# Altium PCB StressMonitor.PcbDoc
Units mm, origin at the board's own origin, x right, y up, seen from the top; angles counter-clockwise.
Board outline 120.4 x 93.47 mm, 2 copper layers (Top Layer, Bottom Layer); 66 components, 80 nets, 518 pads, 43 vias.
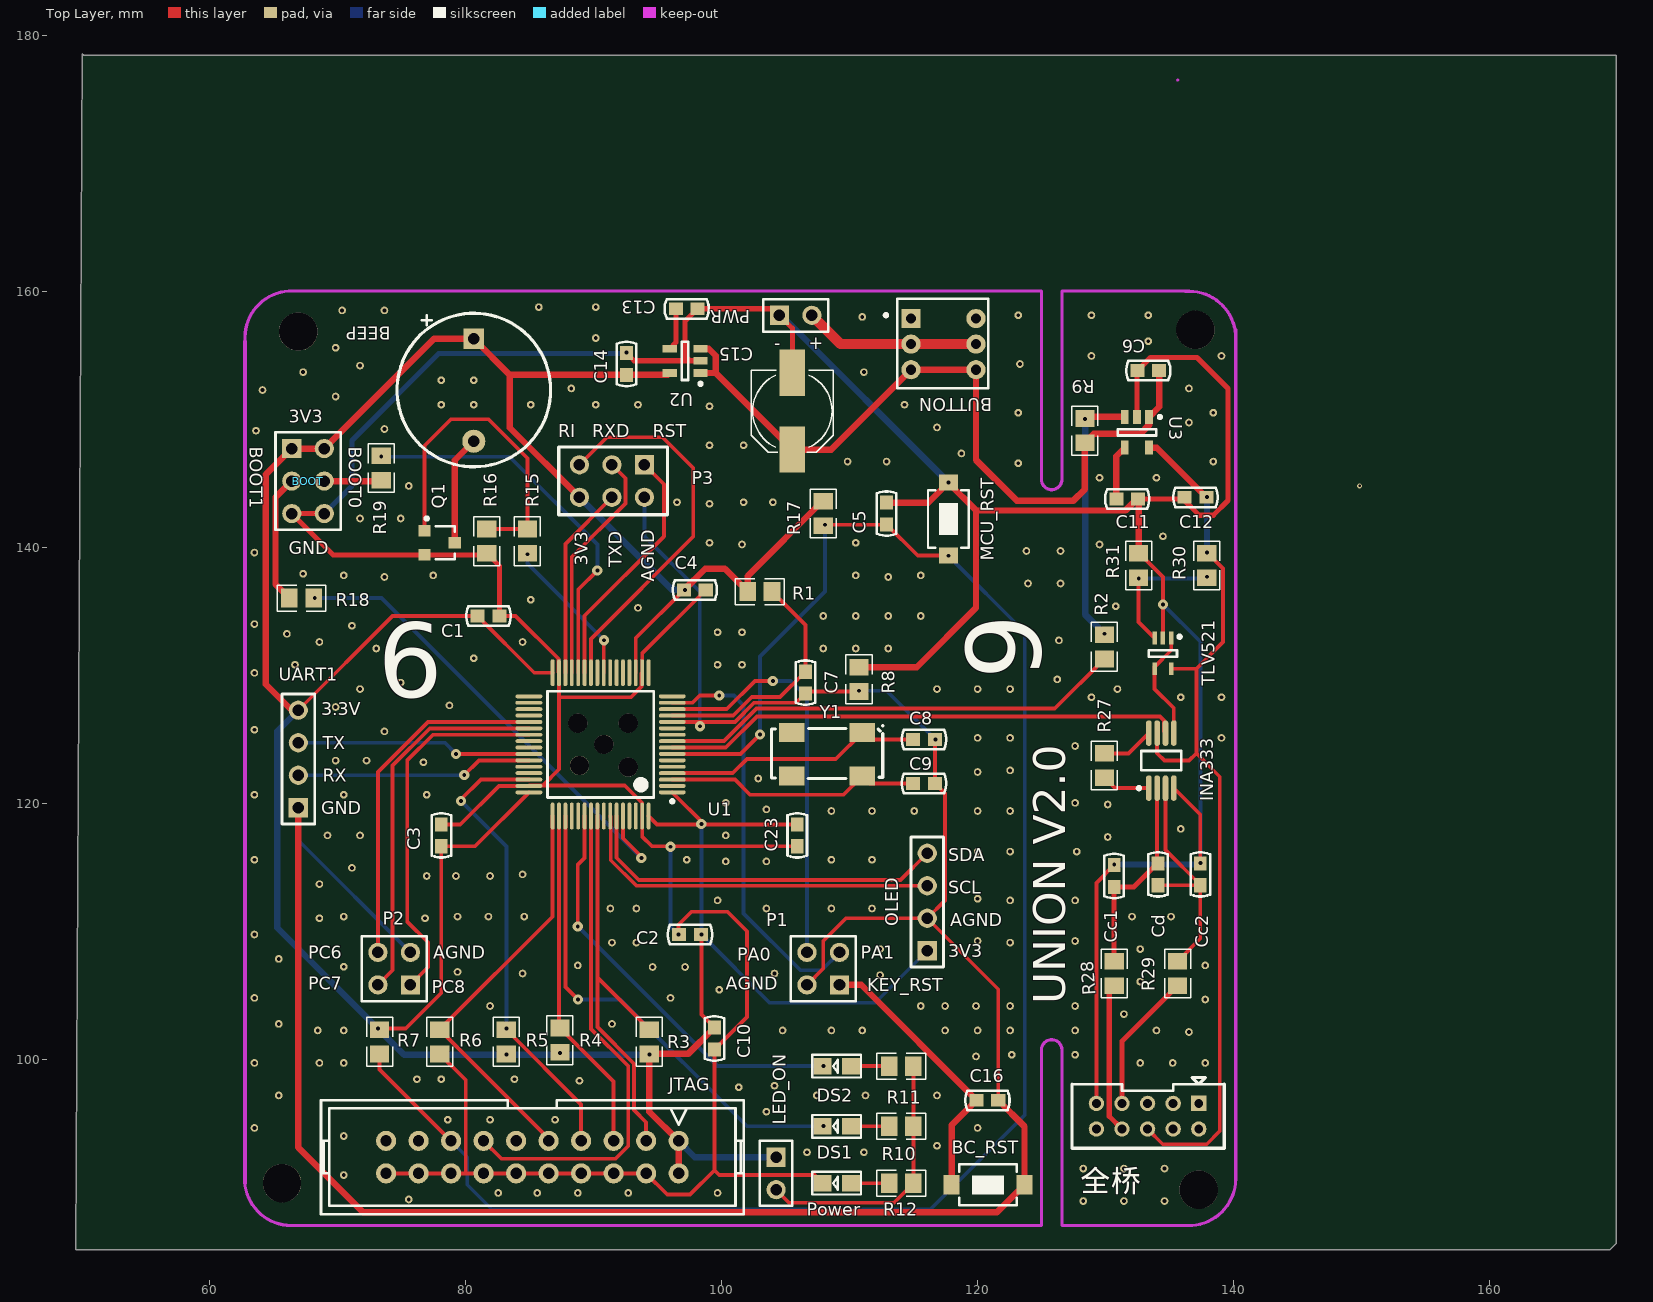
[diagram p0: Top Layer view]
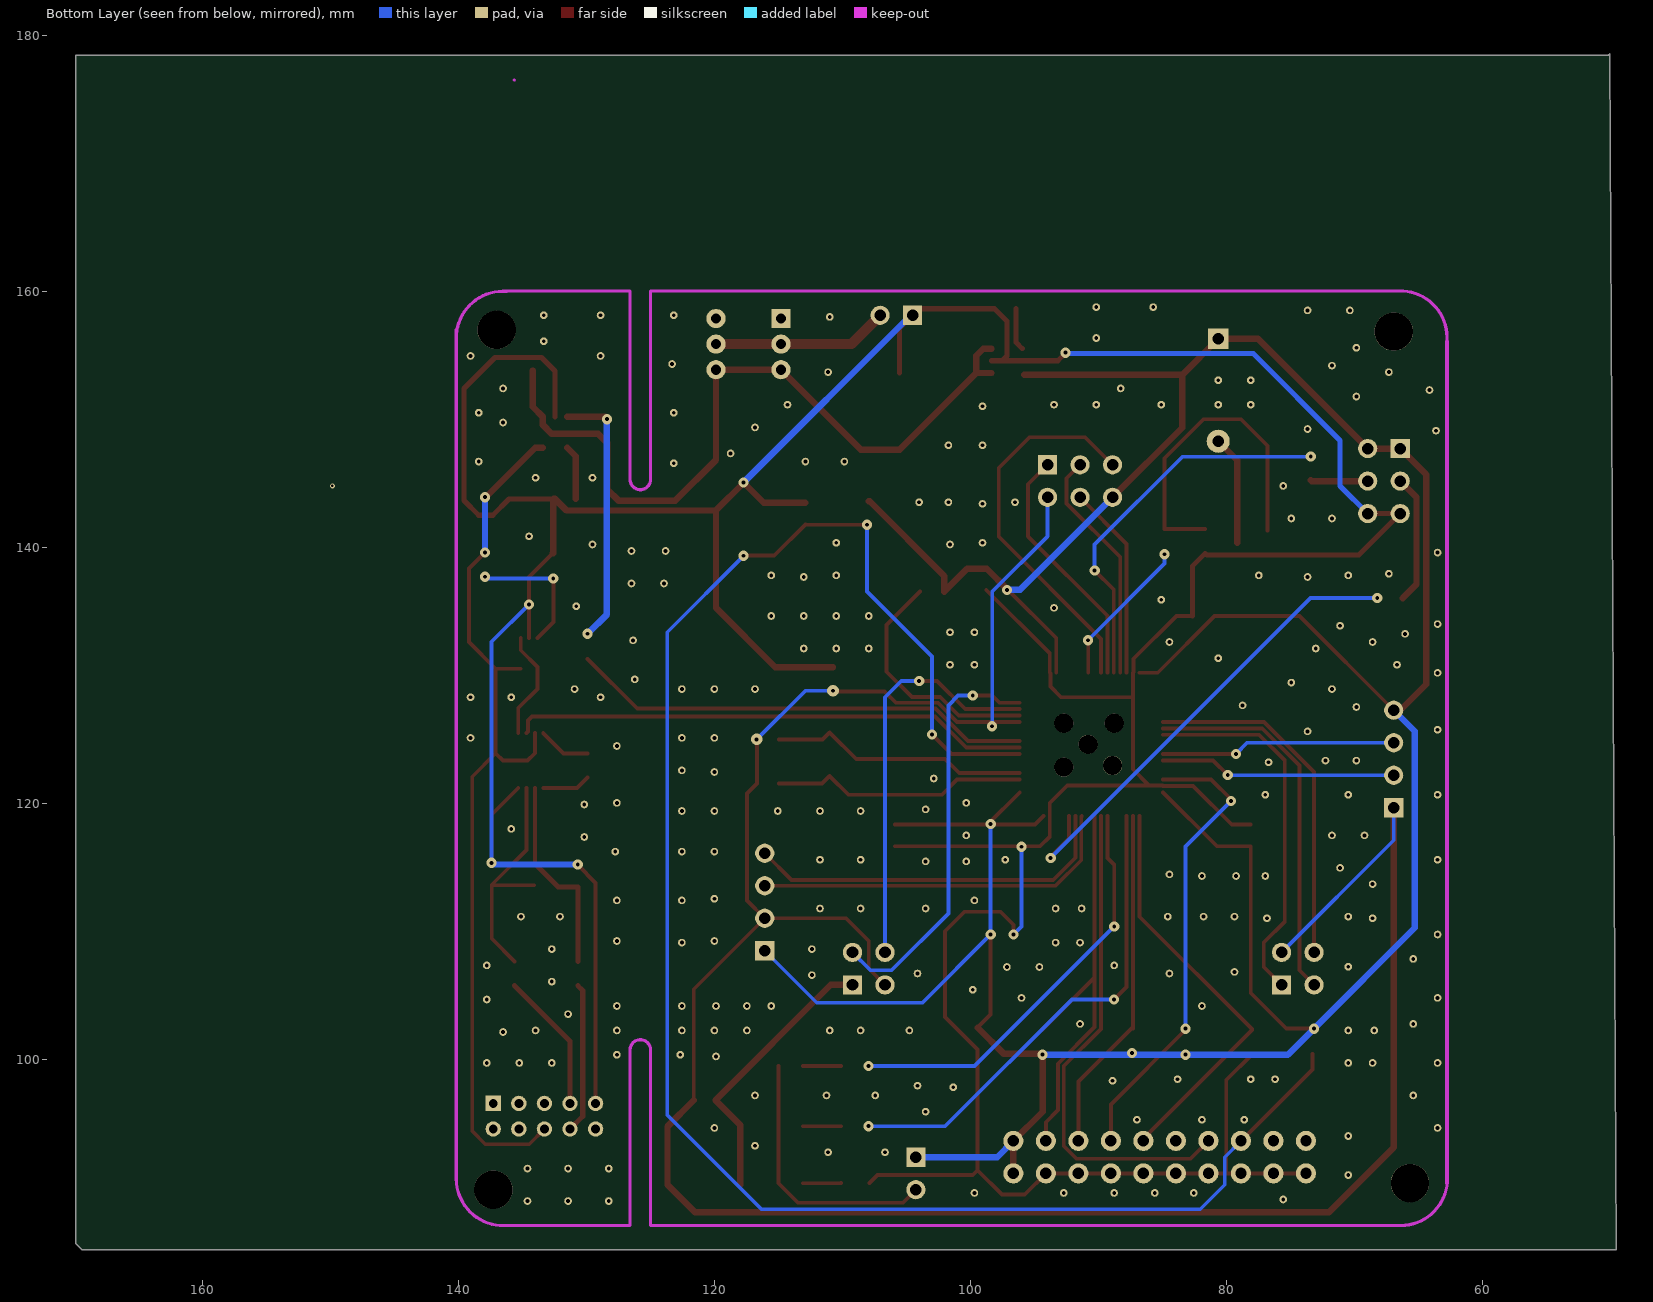
[diagram p1: Bottom Layer view, seen from below]

## Layer stack, top to bottom
Top Layer: signal copper 0.0356
Dielectric: dielectric 0.32, FR-4, Dk 4.8
Bottom Layer: signal copper 0.0356

## Board outline
50.038,178.562 50.165,178.435 169.926,178.435 169.926,85.598 169.418,85.09 49.53,85.09

## Design rules (kind name [scope] priority, off if disabled: settings)
Clearance [All] p1: gap=0.152
HoleSize [All] p1: absolutevalues=TRUE maxlimit=4 minlimit=0.025 maxpercent=80.000 minpercent=20.000
MinimumSolderMaskSliver [All] p1: minsoldermaskwidth=0
PolygonConnect [All] p1: connectstyle=Relief reliefconductorwidth=0.254 reliefentries=4 polygonreliefangle="90 Angle" airgapwidth=0.254
RoutingVias [All] p1: holewidth=0.3 width=1.6 viastyle="Through Hole" minholewidth=0.1 minwidth=0.4 maxholewidth=0.8 maxwidth=1.27
SilkToSilkClearance [All] p1: silktosilkclearance=0
SilkToSolderMaskClearance [IsPad] p1: minsilkscreentomaskgap=0 clearancetoexposedcopper=TRUE
SolderMaskExpansion [All] p1: expansion=0.102
Width GND [(InNet('AGND') AND InNet('GND'))] p1: maxlimit=0.8 minlimit=0.3 preferedwidth=0.6
Width PWR [(InNet('PWR_IN1') OR InNet('PWR_IN2') OR InNet('PWR_MCU') OR InNet('VDDA') OR InNet('PWR_SGN'))] p2: maxlimit=0.8 minlimit=0.3 preferedwidth=0.5
Width [All] p3: maxlimit=0.8 minlimit=0.256 preferedwidth=0.3
24 further rules are at their usual default settings.

## Components (designator, comment, footprint, x,y, rotation, side; value= is the part's Value field where it differs from the comment)
BC_RST "SW-PB" SW_PB2_A2 120.777,90.17 r270 top
BEEP "BEEP" Beep 80.645,152.273 r270 top
BOOT "HEADER3×2" HDR2X3 66.421,147.701 r270 top
BUTTON "SW-DPDT1" SWITCH_B2 117.348,155.321 r0 top (schematic designator BUTTON1)
C1 "104" C-RAD-0603 81.788,134.62 r180 top
C2 "104" C-RAD-0603 97.536,109.728 r0 top
C3 "104" C-RAD-0603 78.105,117.475 r270 top
C4 "104" C-RAD-0603 97.917,136.652 r0 top
C5 "104" C-RAD-0603 112.903,142.621 r90 top
C6 "1uF" C-RAD-0603 133.35,153.797 r180 top
C7 "104" C-RAD-0603 106.553,129.413 r270 top
C8 "4.3pF" C-RAD-0603 115.824,124.968 r180 top
C9 "4.3pF" C-RAD-0603 115.824,121.539 r180 top
C10 "104" C-RAD-0603 99.441,101.6 r270 top
C11 "0.01uF" C-RAD-0603 131.699,143.764 r0 top
C12 "1uF" C-RAD-0603 137.033,143.891 r0 top
C13 "0.01uF" C-RAD-0603 97.282,158.623 r0 top
C14 "1uF" C-RAD-0603 92.583,154.305 r270 top
C15 "100uF" C-RB-S6 105.537,150.622 r90 top
C16 "104" C-RAD-0603 120.777,96.774 r180 top
C23 "1uF" C-RAD-0603 105.918,117.475 r90 top
Cc1 "Cap" C-RAD-0603 130.683,114.3 r90 top
Cc2 "Cap" C-RAD-0603 137.414,114.427 r270 top
Cd "Cap" C-RAD-0603 134.112,114.427 r90 top
DS1 "LED1" SMDLED 110.109,94.742 r180 top
DS2 "LED2" SMDLED 110.109,99.441 r180 top
INA333 "AD620" MSOP-MS8_M 134.366,123.317 r90 top
JTAG "JTAG" JTAG_20 85.217,92.329 r180 top
LED_ON "Header 2" HDR2X1_A 104.267,92.329 r270 top
MCU_RST "SW-PB" SW_PB2_A2 117.729,142.24 r180 top (schematic designator RESET)
OLED "OLED" HDR4X1_A 116.078,108.458 r90 top
P1 "BC95_P1" HDR2X2_A 109.22,105.791 r180 top
P2 "BC95_P2" HDR2X2_A 75.692,105.791 r180 top
P3 "BC95_P3" HDR3X2 93.98,146.431 r180 top
Power "LED3" SMDLED 110.109,90.297 r180 top
PWR "Header 2" HDR2X1_A 104.521,158.115 r0 top
Q1 "S9014_SOT" SOT-23 77.978,140.335 r270 top
R1 "10R" 0805-1 102.997,136.525 r0 top
R2 "Res1" 0805-1 129.921,132.207 r90 top
R3 "10k" 0805-1 94.361,101.346 r90 top
R4 "10k" 0805-1 87.376,101.473 r90 top
R5 "10k" 0805-1 83.185,101.346 r90 top
R6 "10k" 0805-1 77.978,101.346 r270 top
R7 "10k" 0805-1 73.279,101.346 r270 top
R8 "0R" 0805-1 110.744,129.667 r270 top
R9 "Res1" 0805-1 128.397,149.098 r270 top
R10 "1k" 0805-1 114.046,94.742 r0 top
R11 "1k" 0805-1 114.046,99.441 r0 top
R12 "1k" 0805-1 114.046,90.297 r0 top
R15 "1K" 0805-1 84.836,140.462 r270 top
R16 "10K" 0805-1 81.661,140.462 r270 top
R17 "10K" 0805-1 107.95,142.621 r90 top
R18 "10K" 0805-1 67.183,136.017 r180 top
R19 "10K" 0805-1 73.406,146.177 r90 top
R27 "正式" 0805-1 129.921,122.936 r90 top
R28 "Res1" 0805-1 130.683,106.68 r90 top
R29 "Res1" 0805-1 135.636,106.68 r90 top
R30 "" 0805-1 137.922,138.557 r90 top
R31 "" 0805-1 132.588,138.557 r270 top
TLV521 "TLV521" DCK-5 134.493,131.699 r270 top
U1 "STM32L152RET6/RBT6/R8T6" LQFP-64 90.551,124.587 r180 top
U2 "SGM2036" SOT23-5 97.155,154.559 r180 top
U3 "SGM2036" SOT23-5 132.461,148.971 r270 top
UART1 "Header 4" HDR4X1_A 66.929,119.634 r90 top
Y1 "XTAL_8x3.8" XTAL_8x3.8 108.204,123.825 r0 top
全桥 "连接全桥" HDR5*2_2mm 137.287,96.52 r0 top

## Footprints (in the part's own frame and the unit in brackets; to place one, negate y for a bottom-side part, rotate by r counter-clockwise, add the part's x,y. Pads: shape width x height; smd on the part's side, far side on the other; paste and mask are expansions set on the pad)
0805-1 [mm] "贴片带丝印"
  rect 1.3x1.5 smd: 1(-0.95,0) 2(0.95,0)
  silkscreen extent -1.91,-1.02 1.91,1.02, body extent -1.14,-0.51 1.14,0.51, height 1
Beep [mm] "蜂鸣器"
  rect 1.6x1.6 hole 0.9: 1(-4,0)
  round 1.8 hole 0.9: 2(4,0)
  silkscreen extent -6,-6 6,6
C-RAD-0603 [mm] "贴片电容"
  rect 1.1x1 smd: 1(-0.85,0) 2(0.85,0)
  silkscreen extent -1.73,-0.76 1.73,0.76, body extent -1.14,-0.38 1.14,0.38, height 1
C-RB-S6 [mm] "贴片电解；220uF/16V/VT"
  rect 3.6x2 smd: 1(-3,0) 2(3,0)
  silkscreen extent -3.2,-3.2 3.2,3.2
DCK-5 [mm] "TLV521"
  rect 1x0.35 smd: 1(-1.2,0.65) 2(-1.2,0) 3(-1.2,-0.65) 4(1.2,-0.65) 5(1.2,0.65)
  silkscreen extent -1.42,-1.1 0.25,1.43, body extent -0.87,-1.1 0.87,1.1, height 1.45
HDR2X1_A [mm] "Connector; Header; 2 Position"
  rect 1.5x1.5 hole 0.9: 1(0,0)
  round 1.5 hole 0.9: 2(2.54,0)
  silkscreen extent -1.27,-1.27 3.81,1.27
HDR2X2_A [mm] "Connector; Header; 2 Position"
  rect 1.5x1.5 hole 0.9: 1(0,0)
  round 1.5 hole 0.9: 2(2.54,0) 3(2.54,-2.54) 4(0,-2.54)
  silkscreen extent -1.27,-3.81 3.81,1.27
HDR2X3 [mm]
  rect 1.5x1.5 hole 0.9: 1(0,0)
  round 1.5 hole 0.9: 2(0,2.54) 3(2.54,0) 4(2.54,2.54) 5(5.08,0) 6(5.08,2.54)
  silkscreen extent -1.27,-1.27 6.35,3.81
HDR3X2 [mm] "2.54mm"
  rect 1.5x1.5 hole 0.9: 1(0,0)
  round 1.5 hole 0.9: 2(2.54,0) 3(5.08,0) 4(5.08,2.54) 5(2.54,2.54) 6(0,2.54)
  silkscreen extent -1.8,-1.4 6.7,3.9
HDR4X1_A [mm] "Connector; Header; 4 Position"
  rect 1.5x1.5 hole 0.9: 1(0,0)
  round 1.5 hole 0.9: 2(2.54,0) 3(5.08,0) 4(7.62,0)
  silkscreen extent -1.27,-1.27 8.89,1.27
HDR5*2_2mm [mm] "间距2mm的小排插孔"
  rect 1.2x1.2 hole 0.7: 1(0.006,0.012)
  round 1.2 hole 0.7: 2(0.006,-1.988) 3(-1.994,0.012) 4(-1.994,-1.988) 5(-3.994,0.012) 6(-3.994,-1.988) 7(-5.994,0.012) 8(-5.994,-1.988) 9(-7.994,0.012) 10(-7.994,-1.988)
  silkscreen extent -9.9,-3.49 2,2.03
JTAG_20 [mil]
  round 62 hole 35: 1(-450,-50) 2(-450,50) 3(-350,-50) 4(-350,50) 5(-250,-50) 6(-250,50) 7(-150,-50) 8(-150,50) 9(-50,-50) 10(-50,50) 11(50,-50) 12(50,50) 13(150,-50) 14(150,50) 15(250,-50) 16(250,50) 17(350,-50) 18(350,50) 19(450,-50) 20(450,50)
  silkscreen extent -650,-175 650,175
LQFP-64 [mm] "LQFP64"
  oval 2.1x0.3 smd: 1(-5.6,3.75) 2(-5.6,3.25) 3(-5.6,2.75) 4(-5.6,2.25) 5(-5.6,1.75) 6(-5.6,1.25) 7(-5.6,0.75) 8(-5.6,0.25) 9(-5.6,-0.25) 10(-5.6,-0.75) 11(-5.6,-1.25) 12(-5.6,-1.75) 13(-5.6,-2.25) 14(-5.6,-2.75) 15(-5.6,-3.25) 16(-5.6,-3.75) 33(5.6,-3.75) 34(5.6,-3.25) 35(5.6,-2.75) 36(5.6,-2.25) 37(5.6,-1.75) 38(5.6,-1.25) 39(5.6,-0.75) 40(5.6,-0.25) 41(5.6,0.25) 42(5.6,0.75) 43(5.6,1.25) 44(5.6,1.75) 45(5.6,2.25) 46(5.6,2.75) 47(5.6,3.25) 48(5.6,3.75)
  oval 0.3x2.1 smd: 17(-3.75,-5.6) 18(-3.25,-5.6) 19(-2.75,-5.6) 20(-2.25,-5.6) 21(-1.75,-5.6) 22(-1.25,-5.6) 23(-0.75,-5.6) 24(-0.25,-5.6) 25(0.25,-5.6) 26(0.75,-5.6) 27(1.25,-5.6) 28(1.75,-5.6) 29(2.25,-5.6) 30(2.75,-5.6) 31(3.25,-5.6) 32(3.75,-5.6) 49(3.75,5.6) 50(3.25,5.6) 51(2.75,5.6) 52(2.25,5.6) 53(1.75,5.6) 54(1.25,5.6) 55(0.75,5.6) 56(0.25,5.6) 57(-0.25,5.6) 58(-0.75,5.6) 59(-1.25,5.6) 60(-1.75,5.6) 61(-2.25,5.6) 62(-2.75,5.6) 63(-3.25,5.6) 64(-3.75,5.6)
  silkscreen extent -5.72,-4.15 4.15,4.57, body extent -5,-5 5,5, height 1.6
MSOP-MS8_M [mm] "TSOP, 8-Leads, Body 3x3mm, Pitch 0.65mm, IPC Low Density"
  oval 2x0.45 smd: 1(-2.15,0.975) 2(-2.15,0.325) 3(-2.15,-0.325) 4(-2.15,-0.975) 5(2.15,-0.975) 6(2.15,-0.325) 7(2.15,0.325) 8(2.15,0.975)
  silkscreen extent -2.27,-1.55 0.75,1.87, body extent -1.6,-1.6 1.6,1.6, height 1.1
SMDLED [mm] "贴片LED"
  rect 1.4x1.27 smd: 1(0.001,-0.002) 2(2.211,-0.002)
  silkscreen extent -0.8,-0.89 3.01,0.89
SOT23-5 [mm] "SGM2036"
  rect 1.1x0.6 smd: 1(-1.2,0.95) 2(-1.2,0) 3(-1.2,-0.95) 4(1.2,-0.95) 5(1.2,0.95)
  silkscreen extent -1.33,-1.5 0.25,1.92, body extent -0.87,-1.5 0.87,1.5, height 1.45
SOT-23 [mm]
  rect 0.9x0.95 smd: 1(-0.95,-1.175) 2(0.95,-1.175) 3(0,1.175)
  silkscreen extent -2.03,-1.14 1.3,1.18
SW_PB2_A2 [mm] "3*4mm"
  rect 1.5x1.25 smd: 1(0,2.9) 2(0,-2.8)
  silkscreen extent -1.6,-2.2 1.6,2.3, body extent -0.76,-1.14 0.76,1.27, height 1.2
SWITCH_B2 [mm] "单刀，5.08*2.05"
  rect 1.5x1.5 hole 0.8: 1(-2.54,2.54)
  round 1.5 hole 0.8: 2(-2.54,0.54) 3(-2.54,-1.46) 4(2.54,-1.46) 5(2.54,0.54) 6(2.54,2.54)
  silkscreen extent -4.62,-2.9 3.5,4.1
XTAL_8x3.8 [mm] "四脚晶振"
  rect 2x1.5 smd: 1(2.8,1.7) 2(-2.7,1.7) 3(-2.7,-1.7) 4(2.8,-1.7)
  silkscreen extent -4.3,-1.9 4.4,2.23

## Part data
BC_RST MCU_RST: "微动开关"
BOOT: library part "Header 3X2", "Header, 3-Pin, Dual row"
BUTTON: library part SW-DPDT, "单刀双掷开关"
C1 C2 C3 C4 C5 C6 C7 C8 C9 C10 C11 C12 C13 C14 C16 C23: library part C
C15: library part CAP
Cc1 Cc2 Cd: "无极性电容"
DS1 Power: library part LED2, "Typical RED, GREEN, YELLOW, AMBER GaAs LED"
DS2: "Typical RED, GREEN, YELLOW, AMBER GaAs LED"
INA333: "仪用放大器"
LED_ON PWR UART1: "接插件"
P1 P2: "连接BC的GND等四个脚"
P3: "BC95的通信部分"
Q1: "NPN三极管"
R1 R3 R4 R5 R6 R7 R8 R10 R11 R12 R15 R16 R18 R19: library part R
R2 R9 R28 R29: "贴片电阻"
R17 R27 R30 R31: library part Res1, "贴片电阻"
TLV521 U2 U3: "低功耗稳压"
U1: library part STM32F103RDT6
Y1: "贴片晶振"
全桥: library part StrainGage, "全桥应变片插口;从TB购买"

## Free pads (board coordinates)
  round 0.6 hole 0.3: 0(63.5,94.615) 0(63.5,99.695) 0(63.5,104.775) 0(63.5,109.728) 0(63.5,115.57) 0(63.5,120.65) 0(63.5,125.73) 0(63.5,130.175) 0(63.5,133.985) 0(63.5,139.573) 0(63.627,149.098) 0(64.135,152.273) 0(65.405,97.155) 0(65.405,102.743) 0(65.405,107.823) 0(66.04,133.223) 0(66.675,130.81) 0(67.31,137.922) 0(67.31,153.67) 0(68.453,102.235) 0(68.58,99.695) 0(68.58,110.998) 0(68.58,113.665) 0(68.58,132.588) 0(69.215,117.475) 0(69.85,123.317) 0(69.85,127.508) 0(69.85,151.765) 0(69.85,155.575) 0(70.358,158.496) 0(70.485,90.932) 0(70.485,93.98) 0(70.485,99.695) 0(70.485,102.235) 0(70.485,107.212) 0(70.485,111.125) 0(70.485,120.65) 0(70.485,137.795) 0(71.12,114.935) 0(71.12,133.858) 0(71.755,117.475) 0(71.755,128.905) 0(71.755,142.24) 0(71.755,154.178) 0(72.263,123.317) 0(73.025,132.08) 0(73.66,125.603) 0(73.66,137.668) 0(73.66,149.225) 0(73.66,158.496) 0(74.93,129.413) 0(74.93,142.24) 0(75.565,89.027) 0(75.565,144.78) 0(76.2,98.425) 0(76.708,123.19) 0(76.835,110.998) 0(76.962,114.3) 0(76.962,120.65) 0(77.47,137.795) 0(78.105,98.425) 0(78.105,151.13) 0(78.105,153.035) 0(78.613,95.25) 0(78.74,127.635) 0(79.248,114.3) 0(79.375,106.807) 0(79.375,111.125) 0(80.645,131.318) 0(80.645,151.13) 0(80.645,153.035) 0(81.788,111.125) 0(81.915,95.25) 0(81.915,104.14) 0(81.915,114.3) 0(82.55,89.535) 0(83.82,98.425) 0(84.455,106.68) 0(84.455,114.427) 0(84.455,132.588) 0(84.582,111.125) 0(85.09,135.89) 0(85.09,151.13) 0(85.598,89.535) 0(85.725,158.75) 0(86.995,95.25) 0(88.265,152.4) 0(88.773,89.535) 0(88.773,107.315) 0(88.9,98.298) 0(90.17,151.13) 0(90.17,156.337) 0(90.17,158.75) 0(91.313,111.76) 0(91.44,102.743) 0(91.44,109.093) 0(92.71,89.535) 0(93.345,109.093) 0(93.345,111.76) 0(93.472,135.255) 0(93.472,151.13) 0(94.615,107.188) 0(96.012,104.775) 0(96.52,143.51) 0(97.155,107.188) 0(97.282,115.57) 0(99.06,140.335) 0(99.06,143.383) 0(99.06,147.955) 0(99.06,151.003) 0(99.695,89.535) 0(99.695,112.395) 0(99.695,130.81) 0(99.695,133.35) 0(99.822,105.41) 0(100.33,115.443) 0(100.33,117.475) 0(100.33,120.015) 0(101.346,97.79) 0(101.6,130.81) 0(101.6,133.35) 0(101.6,140.208) 0(101.727,143.51) 0(101.727,147.955) 0(102.87,121.92) 0(103.505,95.885) 0(103.505,111.76) 0(103.505,115.443) 0(103.505,119.507) 0(104.013,143.51) 0(104.14,97.917) 0(104.14,106.68) 0(104.775,102.235) 0(106.68,92.71) 0(107.442,97.155) 0(107.95,132.08) 0(107.95,134.62) 0(108.585,102.235) 0(108.585,111.76) 0(108.585,115.57) 0(108.585,119.38) 0(109.855,146.685) 0(110.49,132.08) 0(110.49,134.62) 0(110.49,137.795) 0(110.49,140.335) 0(110.998,102.235) 0(110.998,157.988) 0(111.125,92.71) 0(111.125,153.67) 0(111.252,97.155) 0(111.76,111.76) 0(111.76,115.57) 0(111.76,119.38) 0(112.395,106.553) 0(112.395,108.585) 0(112.903,146.685) 0(113.03,132.08) 0(113.03,134.62) 0(113.03,137.668) 0(114.3,151.13) 0(115.062,119.38) 0(115.57,104.14) 0(115.57,134.62) 0(115.57,137.795) 0(116.84,93.218) 0(116.84,97.155) 0(116.84,128.905) 0(116.84,149.352) 0(117.475,102.235) 0(117.475,104.14) 0(118.745,147.32) 0(119.888,100.203) 0(119.888,104.14) 0(120.015,94.615) 0(120.015,102.235) 0(120.015,109.22) 0(120.015,112.522) 0(120.015,116.205) 0(120.015,119.38) 0(120.015,122.428) 0(120.015,125.095) 0(120.015,128.905) 0(122.555,102.235) 0(122.555,104.14) 0(122.555,109.093) 0(122.555,112.395) 0(122.555,116.205) 0(122.555,119.38) 0(122.555,122.555) 0(122.555,125.095) 0(122.555,128.905) 0(122.682,100.33) 0(123.19,146.558) 0(123.19,150.495) 0(123.19,158.115) 0(123.317,154.305) 0(123.825,139.7) 0(123.952,137.16) 0(126.238,129.667) 0(126.365,132.715) 0(126.492,137.16) 0(126.492,139.7) 0(127.635,100.33) 0(127.635,102.235) 0(127.635,104.14) 0(127.635,109.22) 0(127.635,112.395) 0(127.635,120.015) 0(127.635,124.46) 0(127.762,116.205) 0(128.27,88.9) 0(128.27,91.44) 0(128.905,128.27) 0(128.905,154.94) 0(128.905,158.115) 0(129.54,140.208) 0(129.54,145.415) 0(130.175,117.348) 0(130.175,119.888) 0(130.81,135.382) 0(130.937,128.905) 0(131.445,88.9) 0(131.445,91.44) 0(131.445,103.505) 0(132.08,111.125) 0(132.715,99.695) 0(132.715,106.045) 0(132.715,108.585) 0(133.35,156.083) 0(133.35,158.115) 0(133.985,102.235) 0(133.985,145.415) 0(134.493,140.843) 0(134.62,88.9) 0(134.62,91.44) 0(135.128,111.125) 0(135.255,99.695) 0(135.89,117.983) 0(135.89,128.27) 0(136.525,102.108) 0(136.525,149.733) 0(136.525,152.4) 0(137.795,99.695) 0(137.795,104.648) 0(137.795,107.315) 0(138.43,146.685) 0(138.43,150.495) 0(139.065,125.095) 0(139.065,128.27) 0(139.065,154.94)
  round 3 hole 3: 0(65.659,90.297) 0(66.929,156.845) 0(137.033,156.972) 0(137.287,89.789)
  round 1.5 hole 1.5: 2(88.773,126.238) 2(88.9,122.936) 2(90.805,124.587) 2(92.71,122.809) 2(92.71,126.238)

## Via types
v1: diameter 0.8, hole 0.3, Top Layer to Bottom Layer, 40 vias
v2: diameter 0.9, hole 0.3, Top Layer to Bottom Layer, 2 vias
v3: diameter 0.406, hole 0.203, Top Layer to Bottom Layer, tented both sides, 1 vias

## Nets (pads, with @x,y where several pads share a name; then routed paths per layer and width w, separated by ;. In a path a pad name is that pad's centre, name@x,y a point inside that pad or via, vN(x,y) a via of type N, cw(c..) or ccw(c..) an arc to the next point about the centre after c; other vN are vias at no path point)
AD_REF: INA333.5 TLV521.1 TLV521.4 | length 8.6
  Top Layer w0.3: TLV521.1 135.143,131.938 133.843,130.638 TLV521.4 133.843,128.92 135.341,127.422 INA333.5
ADC: INA333.6 U1.8 | length 40.6
  Top Layer w0.3: U1.8 100.334,124.337 102.766,126.769 134.259,126.769 134.568,126.46 134.568,125.59 INA333.6
AGND: BC_RST.1 C7.2 C8.1 C9.1 C16.1 OLED.2 P1.2 P2.4 P3.6 R8.2 U1.12 UART1.1 | length 196.2
  Top Layer w0.3: U1.12 97.969,126.337 ; v1(98.31,125.996) 97.969,126.337 ; P1.2 107.95,107.061 107.95,109.22 109.728,110.998 OLED.2 ; R8.2 106.707,128.717 C7.2 105.823,127.833 102.551,127.833 101.054,126.337 97.969,126.337 ; C8.1 C9.1 117.475,120.738 117.475,112.395 OLED.2 ; C16.1 121.627,105.449 OLED.2
  Top Layer w0.5: UART1.1 66.929,93.091 72.009,88.011 121.518,88.011 BC_RST.1 123.677,94.724 C16.1
  Bottom Layer w0.3: UART1.1 66.929,117.094 P2.4 ; P3.6 93.98,140.843 98.298,136.525 v1@98.298,125.996 ; v2(110.744,128.778) 112.903,128.778 v2(116.713,124.968)
BOOT0: R18.1 U1.60 | length 37.8
  Top Layer w0.3: U1.60 92.301,117.249 v1@93.726,115.824
  Bottom Layer w0.3: v1@68.072,136.017 73.43,136.017 v1(93.738,115.709)
  other v1: 68.211,136.029
BOOT1: R19.2 U1.28 | length 30.4
  Top Layer w0.3: U1.28 88.801,136.68 v1(90.297,138.176)
  Bottom Layer w0.3: v1@73.406,147.066 83.439,147.066 90.297,140.208 v1(90.297,138.176)
  other v1: 73.418,147.078
GND: BOOT.5 BOOT.6 C1.1 C2.1 C3.1 C4.2 C5.2 C6.2 C10.2 C11.2 C12.1 C13.2 C14.1 C15.2 C23.1 Cc1.2 Cc2.1 INA333.4 JTAG.4 JTAG.6 JTAG.8 JTAG.10 JTAG.12 JTAG.14 JTAG.16 JTAG.18 JTAG.20 MCU_RST.2 pad.0@63.5,94.615 pad.0@63.5,99.695 pad.0@63.5,104.775 pad.0@63.5,109.728 pad.0@63.5,115.57 pad.0@63.5,120.65 pad.0@63.5,125.73 pad.0@63.5,130.175 pad.0@63.5,133.985 pad.0@63.5,139.573 pad.0@63.627,149.098 pad.0@64.135,152.273 pad.0@65.405,97.155 pad.0@65.405,102.743 pad.0@65.405,107.823 pad.0@66.04,133.223 pad.0@66.675,130.81 pad.0@67.31,137.922 pad.0@67.31,153.67 pad.0@68.58,99.695 pad.0@68.58,110.998 pad.0@68.58,113.665 pad.0@68.58,132.588 pad.0@68.453,102.235 pad.0@69.85,123.317 pad.0@69.85,127.508 pad.0@69.85,151.765 pad.0@69.85,155.575 pad.0@69.215,117.475 pad.0@70.358,158.496 pad.0@70.485,90.932 pad.0@70.485,93.98 pad.0@70.485,99.695 pad.0@70.485,102.235 pad.0@70.485,107.212 pad.0@70.485,111.125 pad.0@70.485,120.65 pad.0@70.485,137.795 pad.0@71.12,114.935 pad.0@71.12,133.858 pad.0@71.755,117.475 pad.0@71.755,128.905 pad.0@71.755,142.24 pad.0@71.755,154.178 pad.0@72.263,123.317 pad.0@73.025,132.08 pad.0@73.66,125.603 pad.0@73.66,137.668 pad.0@73.66,149.225 pad.0@73.66,158.496 pad.0@74.93,129.413 pad.0@74.93,142.24 pad.0@75.565,89.027 pad.0@75.565,144.78 pad.0@76.2,98.425 pad.0@76.708,123.19 pad.0@76.835,110.998 pad.0@76.962,114.3 pad.0@76.962,120.65 pad.0@77.47,137.795 pad.0@78.74,127.635 pad.0@78.105,98.425 pad.0@78.105,151.13 pad.0@78.105,153.035 pad.0@78.613,95.25 pad.0@79.248,114.3 pad.0@79.375,106.807 pad.0@79.375,111.125 pad.0@80.645,131.318 pad.0@80.645,151.13 pad.0@80.645,153.035 pad.0@81.788,111.125 pad.0@81.915,95.25 pad.0@81.915,104.14 pad.0@81.915,114.3 pad.0@82.55,89.535 pad.0@83.82,98.425 pad.0@84.455,106.68 pad.0@84.455,114.427 pad.0@84.455,132.588 pad.0@84.582,111.125 pad.0@85.09,135.89 pad.0@85.09,151.13 pad.0@85.598,89.535 pad.0@85.725,158.75 pad.0@86.995,95.25 pad.0@88.9,98.298 pad.0@88.265,152.4 pad.0@88.773,89.535 pad.0@88.773,107.315 pad.0@90.17,151.13 pad.0@90.17,156.337 pad.0@90.17,158.75 pad.0@91.44,102.743 pad.0@91.44,109.093 pad.0@91.313,111.76 pad.0@92.71,89.535 pad.0@93.345,109.093 pad.0@93.345,111.76 pad.0@93.472,135.255 pad.0@93.472,151.13 pad.0@94.615,107.188 pad.0@96.012,104.775 pad.0@96.52,143.51 pad.0@97.155,107.188 pad.0@97.282,115.57 pad.0@99.06,140.335 pad.0@99.06,143.383 pad.0@99.06,147.955 pad.0@99.06,151.003 pad.0@99.695,89.535 pad.0@99.695,112.395 pad.0@99.695,130.81 pad.0@99.695,133.35 pad.0@99.822,105.41 pad.0@100.33,115.443 pad.0@100.33,117.475 pad.0@100.33,120.015 pad.0@101.6,130.81 pad.0@101.6,133.35 pad.0@101.6,140.208 pad.0@101.346,97.79 pad.0@101.727,143.51 pad.0@101.727,147.955 pad.0@102.87,121.92 pad.0@103.505,95.885 pad.0@103.505,111.76 pad.0@103.505,115.443 pad.0@103.505,119.507 pad.0@104.013,143.51 pad.0@104.14,97.917 pad.0@104.14,106.68 pad.0@104.775,102.235 pad.0@106.68,92.71 pad.0@107.95,132.08 pad.0@107.95,134.62 pad.0@107.442,97.155 pad.0@108.585,102.235 pad.0@108.585,111.76 pad.0@108.585,115.57 pad.0@108.585,119.38 pad.0@109.855,146.685 pad.0@110.49,132.08 pad.0@110.49,134.62 pad.0@110.49,137.795 pad.0@110.49,140.335 pad.0@110.998,102.235 pad.0@110.998,157.988 pad.0@111.76,111.76 pad.0@111.76,115.57 pad.0@111.76,119.38 pad.0@111.125,92.71 pad.0@111.125,153.67 pad.0@111.252,97.155 pad.0@112.395,106.553 pad.0@112.395,108.585 pad.0@112.903,146.685 pad.0@113.03,132.08 pad.0@113.03,134.62 pad.0@113.03,137.668 pad.0@114.3,151.13 pad.0@115.57,104.14 pad.0@115.57,134.62 pad.0@115.57,137.795 pad.0@115.062,119.38 pad.0@116.84,93.218 pad.0@116.84,97.155 pad.0@116.84,128.905 pad.0@116.84,149.352 pad.0@117.475,102.235 pad.0@117.475,104.14 pad.0@118.745,147.32 pad.0@119.888,100.203 pad.0@119.888,104.14 pad.0@120.015,94.615 pad.0@120.015,102.235 pad.0@120.015,109.22 pad.0@120.015,112.522 pad.0@120.015,116.205 pad.0@120.015,119.38 pad.0@120.015,122.428 pad.0@120.015,125.095 pad.0@120.015,128.905 pad.0@122.555,102.235 pad.0@122.555,104.14 pad.0@122.555,109.093 pad.0@122.555,112.395 pad.0@122.555,116.205 pad.0@122.555,119.38 pad.0@122.555,122.555 pad.0@122.555,125.095 pad.0@122.555,128.905 pad.0@122.682,100.33 pad.0@123.19,146.558 pad.0@123.19,150.495 pad.0@123.19,158.115 pad.0@123.317,154.305 pad.0@123.825,139.7 pad.0@123.952,137.16 pad.0@126.238,129.667 pad.0@126.365,132.715 pad.0@126.492,137.16 pad.0@126.492,139.7 pad.0@127.635,100.33 pad.0@127.635,102.235 pad.0@127.635,104.14 pad.0@127.635,109.22 pad.0@127.635,112.395 pad.0@127.635,120.015 pad.0@127.635,124.46 pad.0@127.762,116.205 pad.0@128.27,88.9 pad.0@128.27,91.44 pad.0@128.905,128.27 pad.0@128.905,154.94 pad.0@128.905,158.115 pad.0@129.54,140.208 pad.0@129.54,145.415 pad.0@130.81,135.382 pad.0@130.175,117.348 pad.0@130.175,119.888 pad.0@130.937,128.905 pad.0@131.445,88.9 pad.0@131.445,91.44 pad.0@131.445,103.505 pad.0@132.08,111.125 pad.0@132.715,99.695 pad.0@132.715,106.045 pad.0@132.715,108.585 pad.0@133.35,156.083 pad.0@133.35,158.115 pad.0@133.985,102.235 pad.0@133.985,145.415 pad.0@134.62,88.9 pad.0@134.62,91.44 pad.0@134.493,140.843 pad.0@135.89,117.983 pad.0@135.89,128.27 pad.0@135.128,111.125 pad.0@135.255,99.695 pad.0@136.525,102.108 pad.0@136.525,149.733 pad.0@136.525,152.4 pad.0@137.795,99.695 pad.0@137.795,104.648 pad.0@137.795,107.315 pad.0@138.43,146.685 pad.0@138.43,150.495 pad.0@139.065,125.095 pad.0@139.065,128.27 pad.0@139.065,154.94 Power.2 PWR.1 Q1.2 R6.2 R8.1 R16.2 R31.1 TLV521.2 U1.18 U1.31 U1.47 U1.63 U2.2 U3.2 全桥.9 | length 376.9
  Top Layer w0.3: JTAG.20 JTAG.18 JTAG.16 80.01,91.059 ; R6.2 80.01,98.364 80.01,91.059 ; C3.1 79.59,118.325 82.602,121.337 U1.47 84.999,121.385 86.038,121.385 ; C1.1 83.908,134.62 87.253,131.274 87.253,130.235 U1.31 87.301,128.27 ; v1(96.647,109.728) 96.647,110.49 97.663,111.506 100.457,111.506 101.981,109.982 101.981,103.29 C10.2 99.441,91.313 ; C4.2 93.801,131.686 U1.18 93.753,130.139 93.753,129.1 92.924,128.27 87.301,128.27 ; C23.1 94.576,116.625 93.801,117.4 U1.63 93.801,120.027 92.443,121.385 86.038,121.385 ; Power.2 107.265,90.932 99.822,90.932 99.441,91.313 ; 全桥.9 129.293,113.76 Cc1.2 ; R31.1@132.657,139.507 134.493,137.671 TLV521.2 ; INA333.4 137.414,119.094 Cc2.1 ; 80.01,91.059 JTAG.14 JTAG.12 JTAG.10 JTAG.8 JTAG.6 JTAG.4 95.758,89.408 97.536,89.408 99.441,91.313 ; 86.038,121.385 87.301,122.647 87.301,128.27
  Top Layer w0.4: BOOT.6 BOOT.5 69.657,139.385 Q1.2 81.534,139.385 R16.2 82.638,138.535 C1.1 ; C14.1 93.179,154.559 97.536,154.559 ; U2.2 97.536,154.559 ; C15.2 105.537,157.099 PWR.1 104.013,158.623 C13.2 97.155,157.646 97.155,154.94 97.536,154.559 ; U3.2 132.461,153.758 C6.2 133.516,154.813 137.16,154.813 139.573,152.4 139.573,143.637 138.43,142.494 137.326,142.494 136.056,143.764 C11.2
  Top Layer w0.5: R8.1 115.25,130.617 119.888,135.255 119.888,142.881 ; C5.2 116.16,143.471 MCU_RST.2 119.888,142.881 ; C11.2 C11.2@132.468,143.764 ; R31.1@132.657,139.507 R31.1 132.588,143.644 C11.2@132.468,143.764 ; 119.888,142.881 119.907,142.862 131.566,142.862 C11.2@132.468,143.764
  Bottom Layer w0.3: v1(96.012,116.586) 96.012,110.363 v1(96.647,109.728) ; v1(134.505,135.521) 137.426,132.6 v1(137.426,115.328) v1@137.299,115.201
  Bottom Layer w0.4: BOOT.6 71.12,144.78 71.12,148.336 77.905,155.121 92.51,155.121 v1(92.583,155.194)
  Bottom Layer w0.5: PWR.1 104.672,158.115 v1(117.741,145.046) ; v1(130.695,115.201) v1@137.299,115.201
JTCK: JTAG.9 R6.1 U1.49 | length 32.6
  Top Layer w0.3: JTAG.9 86.487,93.787 R6.1 86.801,111.119 U1.49
JTDI: JTAG.5 R4.2 U1.50 | length 27.2
  Top Layer w0.3: R4.2@87.301,102.362 U1.50 ; R4.2 91.567,98.232 JTAG.5
JTDO: JTAG.13 U1.55 | length 39.3
  Top Layer w0.3: JTAG.13 82.804,92.202 91.711,92.202 92.71,93.201 92.71,99.441 89.801,102.35 U1.55
JTMS: JTAG.7 R5.2 U1.46 | length 36.3
  Top Layer w0.3: v1@79.629,120.269 81.197,121.837 U1.46 ; R5.2 89.027,96.454 JTAG.7
  Bottom Layer w0.3: v1(79.641,120.154) 83.197,116.598 v1(83.197,102.374)
JTRST: JTAG.3 R3.2 U1.56 | length 32.7
  Top Layer w0.3: U1.56 90.301,106.356 ; JTAG.3 94.107,95.059 93.162,96.004 93.162,99.628 90.301,102.49 90.301,106.356 ; R3.2 90.301,106.356
NetBC_RST_2: BC_RST.2 C16.2 P1.1 | length 21.9
  Top Layer w0.5: P1.1 110.91,105.791 C16.2 117.977,94.824 BC_RST.2
NetBEEP_2: BEEP.2 Q1.3 | length 8.6
  Top Layer w0.5: Q1.3 79.153,146.781 BEEP.2
NetBOOT_3: BOOT.3 R18.2 | length 10.1
  Top Layer w0.5: R18.2 65.151,137.099 65.151,143.891 BOOT.3
NetBOOT_4: BOOT.4 R19.1 | length 4.6
  Top Layer w0.5: BOOT.4@69.022,145.222 BOOT.4 73.34,145.161 R19.1
NetC11_1: C11.1 U3.4 | length 4.3
  Top Layer w0.5: C11.1 130.849,147.109 U3.4
NetC13_1: C13.1 U2.4 | length 3.3
  Top Layer w0.4: U2.4 96.432,155.986 C13.1
NetCc1_1: Cc1.1 Cd.2 INA333.2 R28.2 | length 15.8
  Top Layer w0.3: Cd.2@134.041,115.277 INA333.2
  Top Layer w0.4: R28.2 Cc1.1 132.214,113.45 Cd.2@134.041,115.277
NetCc2_2: Cc2.2 Cd.1 INA333.3 R29.2 | length 18.7
  Top Layer w0.3: Cd.1 Cc2.2 ; INA333.3 134.691,116.345 137.414,113.622 Cc2.2 ; R29.2 137.414,109.408 Cc2.2
NetDS1_1: DS1.1 R10.1 | length 3
  Top Layer w0.3: DS1.1 110.11,94.742 R10.1
NetDS2_1: DS2.1 R11.1 | length 3
  Top Layer w0.3: DS2.1 110.11,99.441 R11.1
NetINA333_1: INA333.1 R27.1 | length 3.8
  Top Layer w0.3: R27.1 130.74,121.167 INA333.1
NetINA333_8: INA333.8 R27.2 | length 4.1
  Top Layer w0.3: R27.2 131.81,123.886 INA333.8
NetLED_ON_2: LED_ON.2 R10.2 R11.2 R12.2 | length 20.9
  Top Layer w0.3: LED_ON.2 105.283,88.773 113.472,88.773 R12.2 R10.2 R11.2
NetPower_1: Power.1 R12.1 | length 3
  Top Layer w0.3: Power.1 110.11,90.297 R12.1
NetQ1_1: Q1.1 R15.1 R16.1 | length 25.5
  Top Layer w0.3: Q1.1 76.803,147.923 78.867,149.987 81.788,149.987 84.836,146.939 R15.1 R16.1
NetR2_2: R2.2 R9.1 U3.3 | length 20.6
  Top Layer w0.5: R9.1 128.52,150.171 U3.3
  Bottom Layer w0.5: v1(128.409,149.999) 128.409,134.735 v1@129.921,133.223
  other v1: 129.933,133.235
NetR28_1: R28.1 全桥.8 | length 11.8
  Top Layer w0.4: R28.1 130.302,105.349 130.302,95.523 全桥.8
NetR29_1: R29.1 全桥.7 | length 11
  Top Layer w0.4: 全桥.7 131.293,101.387 R29.1
NetR30_1: R30.1 R31.2 TLV521.3 | length 10.6
  Top Layer w0.3: R31.2 132.588,134.154 TLV521.3
  Bottom Layer w0.3: v1(132.6,137.553) 137.807,137.553 v1(137.934,137.68)
OLED_SCL: OLED.3 U1.58 | length 29
  Top Layer w0.3: U1.58 91.349,118.939 91.349,115.534 93.345,113.538 OLED.3
OLED_SDA: OLED.4 U1.59 | length 29.1
  Top Layer w0.3: U1.59 91.801,115.722 93.532,113.99 113.99,113.99 OLED.4
PA0: P1.3 U1.14 | length 31.9
  Top Layer w0.3: U1.14 100.413,127.337 102.616,129.54 v1(104.013,129.54)
  Bottom Layer w0.3: v1(104.013,129.54) 105.41,129.54 106.68,128.27 P1.3
PA1: P1.4 U1.15 | length 32.3
  Top Layer w0.3: U1.15 97.738,127.837 98.298,128.397 v1(99.822,128.397)
  Bottom Layer w0.3: v1(99.822,128.397) 100.965,128.397 101.727,127.635 101.727,111.379 106.172,106.934 107.823,106.934 P1.4
PA2: U1.16
PA3: U1.17
PA4: U1.20
PA5: U1.21
PA6: U1.22
PA7: U1.23
PA8: U1.41
PA11: U1.44
PA12: U1.45
PB0: P3.3 U1.26 | length 30.1
  Top Layer w0.3: P3.3 91.059,148.59 95.377,148.59 97.79,146.177 97.79,140.819 89.801,132.83 U1.26
PB1: P3.1 U1.27 | length 19.4
  Top Layer w0.3: U1.27 89.301,134.64 95.504,140.843 95.504,144.907 P3.1
PB5: U1.57
PB8: U1.61
PB9: U1.62
PB10: P3.2 U1.29 | length 18.4
  Top Layer w0.3: U1.29 88.301,139.228 92.492,143.419 92.492,145.379 P3.2
PB11: P3.5 U1.30 | length 15.2
  Top Layer w0.3: U1.30 87.801,140.252 P3.5
PB12: U1.33
PB13: U1.34
PB14: U1.35
PB15: U1.36
PC2: U1.10
PC3: U1.11
PC4: R15.2 U1.24 | length 11.7
  Top Layer w0.3: U1.24 v1@90.801,132.727
  Bottom Layer w0.3: v1(84.836,139.446) 84.836,138.708 v1(90.817,132.727)
PC5: U1.25
PC6: P2.3 U1.37 | length 27.5
  Top Layer w0.3: P2.3 73.152,122.428 77.061,126.337 U1.37
PC7: P2.2 U1.38 | length 29.5
  Top Layer w0.3: P2.2 74.295,106.934 74.295,122.931 77.201,125.837 U1.38
PC8: P2.1 U1.39 | length 29.1
  Top Layer w0.3: P2.1 77.089,107.188 77.089,109.093 75.438,110.744 75.438,123.317 77.458,125.337 U1.39
PC9: U1.40
PC10: DS1.2 U1.51 | length 37.9
  Top Layer w0.3: U1.51 87.801,105.62 v1@88.773,104.648
  Bottom Layer w0.3: v1(88.785,104.66) 92.063,104.66 101.981,94.742 v1@107.823,94.742
  other v1: 107.962,94.754
PC11: U1.52
PC12: U1.53
PC13: U1.2
PC14: C9.2 U1.3 Y1.4 | length 20.2
  Top Layer w0.3: U1.3 101.048,121.837 102.235,120.65 109.529,120.65 Y1.4 111.59,121.539 C9.2
PC15: C8.2 U1.4 Y1.1 | length 20.4
  Top Layer w0.3: U1.4 100.874,122.337 101.981,123.444 108.923,123.444 Y1.1 111.561,124.968 C8.2
PD0: U1.5
PD1: U1.6
PD2: DS2.2 U1.54 | length 32.5
  Top Layer w0.3: v1(88.773,110.363) 88.773,115.189 89.301,115.717 U1.54
  Bottom Layer w0.3: v1(88.773,110.363) 99.695,99.441 v1@107.95,99.441
  other v1: 107.962,99.453
PWR_IN1: BUTTON.2 BUTTON.5 PWR.2 | length 13.8
  Top Layer w0.8: PWR.2 109.315,155.861 BUTTON.2 BUTTON.5
PWR_IN2: BUTTON.3 BUTTON.4 C6.1 C15.1 R9.2 U2.1 U2.3 U3.1 | length 60.4
  Top Layer w0.5: U2.3 98.999,155.509 99.55,154.958 99.55,153.609 ; U2.1@98.357,153.607 U2.1 99.55,153.609 ; C6.1 134.2,150.96 U3.1 133.411,149.545 132.71,148.844 129.093,148.844 R9.2 128.397,144.526 127.508,143.637 123.063,143.637 119.888,146.812 BUTTON.4 BUTTON.3 108.569,147.622 C15.1 99.55,153.609
PWR_MCU: BEEP.1 BOOT.1 BOOT.2 C1.2 C2.2 C3.2 C4.1 C10.1 C14.2 C23.2 JTAG.1 JTAG.2 LED_ON.1 OLED.1 P3.4 R1.1 R3.1 R4.1 R5.1 R7.1 R17.2 U1.1 U1.19 U1.32 U1.48 U1.64 U2.5 UART1.4 | length 283
  Top Layer w0.3: UART1.4 74.295,134.62 C1.2 85.371,130.187 U1.32 ; v1(73.164,102.374) 75.323,102.374 78.105,105.156 C3.2 80.739,116.625 U1.48 ; U1.19 93.301,132.886 C4.1 ; U1.64 94.963,118.325 v1@98.663,118.325 ; U1.1 v1@98.663,118.325 ; v1(98.425,109.728) 98.425,103.466 C10.1 ; C23.2 v1@98.663,118.325
  Top Layer w0.5: UART1.4 66.421,127.254 64.389,129.286 64.389,145.669 BOOT.1 BOOT.2 77.533,156.273 BEEP.1 83.463,153.455 ; P3.4 83.463,149.328 83.463,153.455 ; U2.5@95.801,153.455 C14.2 83.463,153.455 ; JTAG.2 JTAG.1 94.361,95.885 R3.1 97.387,100.396 C10.1 ; C4.1 98.718,138.303 100.269,138.303 R1.1 102.047,137.737 107.881,143.571 R17.2
  Bottom Layer w0.3: v1(98.425,118.364) v1(98.425,109.728) 103.759,104.394 112.014,104.394 OLED.1
  Bottom Layer w0.5: UART1.4 65.278,125.603 65.278,110.26 v1(73.164,102.374) 75.196,100.342 v1(83.197,100.342) v1(94.373,100.342) ; P3.4 96.127,136.664 v1@96.913,136.664 ; JTAG.1 97.917,92.329 LED_ON.1
  other v1: 87.388,100.469 97.155,136.652
PWR_SGN: C12.2 INA333.7 R30.2 TLV521.5 U3.5 全桥.6 | length 71.4
  Top Layer w0.3: 全桥.6 134.48,93.345 137.922,93.345 138.938,94.361 138.938,122.06 137.103,123.895 ; INA333.7 134.041,123.896 134.62,123.317 136.525,123.317 137.103,123.895 ; TLV521.5 137.103,130.499 ; v1(137.934,139.585) 139.192,138.327 139.192,132.588 137.103,130.499 ; 137.103,123.895 137.103,130.499
  Top Layer w0.5: U3.5 134.003,147.771 C12.2
  Bottom Layer w0.5: v1(137.934,139.585) v1(137.934,143.903)
RESET: C5.1 JTAG.15 MCU_RST.1 R7.2 R17.1 U1.7 | length 143.2
  Top Layer w0.3: R7.2 73.279,99.187 JTAG.15 ; U1.7 101.485,123.837 v1@102.997,125.349 ; v1(108.089,141.744) 112.876,141.744 C5.1 115.334,139.34 MCU_RST.1
  Bottom Layer w0.3: JTAG.15 80.137,92.329 80.137,90.17 82.042,88.265 116.332,88.265 123.698,95.631 123.698,133.35 v1(117.729,139.319) ; v1(103.009,125.361) 103.009,131.457 108.077,136.525 v1@108.077,141.732
RX: U1.43 UART1.2 | length 18.5
  Top Layer w0.3: v1@79.883,122.174 v1(79.895,122.186) 81.046,123.337 U1.43
  Bottom Layer w0.3: UART1.2 79.883,122.174 v1(79.895,122.186)
SGM_EN: R2.1 U1.9 | length 36.4
  Top Layer w0.3: U1.9 100.194,124.837 102.738,127.381 126.045,127.381 R2.1
TX: U1.42 UART1.3 | length 18.4
  Top Layer w0.3: v1(79.26,123.837) U1.42
  Bottom Layer w0.3: UART1.3 78.383,124.714 v1(79.26,123.837)
VDDA: C7.1 R1.2 U1.13 | length 19.2
  Top Layer w0.3: U1.13 100.915,126.837 102.363,128.286 104.576,128.286 C7.1 106.553,133.919 R1.2
pads on no net: BUTTON.1 BUTTON.6 JTAG.11 JTAG.17 JTAG.19 Y1.2 Y1.3 全桥.1 全桥.2 全桥.3 全桥.4 全桥.5 全桥.10
copper on no net:
  other v3: 149.86,144.78

## Keep-outs
Keep-Out Layer:
  lines w0.254: 62.738,90.394 ccw(c66.406,90.663) 66.675,86.995 ; 62.768,156.083 cw(c66.436,156.352) 66.167,160.02 125,160 125,145.304 ccw(c125.8,145.286) 126.6,145.286 ; 66.421,86.995 125,86.995 125,100.709 cw(c125.8,100.709) 126.6,100.709 126.6,86.995 136.779,86.995 ccw(c136.51,90.663) 140.178,90.932 ; 126.6,145.288 126.6,160.02 136.398,160.02 ; 135.636,176.5 135.642,176.494 ; 136.241,159.99 cw(c136.51,156.322) 140.178,156.591
  lines w0.3: 62.768,90.297 62.768,156.083 ; 140.178,90.932 140.178,156.972

## Silkscreen, mask and mechanical layers (free items; w line width, h text height)
Top Overlay:
  text "-" at 104.14,155.448 h1
  text "+" at 106.807,155.448 h1
  text "3V3" at 66.167,149.733 h1
  text "RI" at 87.249,148.59 h1
  text "RXD" at 89.916,148.59 h1
  text "RST" at 94.615,148.59 h1
  text "BOOT1" at 63.119,147.828 h1 r270
  text "BOOT0" at 70.866,147.828 h1 r270
  text "GND" at 66.167,139.446 h1
  text "3V3" at 89.535,138.557 h1 r90
  text "TXD" at 92.202,138.43 h1 r90
  text "AGND" at 94.742,137.287 h1 r90
  text "6" at 117.221,134.747 h10 r270
  text "3.3V" at 68.707,126.873 h1
  text "6" at 73.152,126.365 h10
  text "TX" at 68.834,124.206 h1
  text "RX" at 68.834,121.666 h1
  text "GND" at 68.707,119.126 h1
  text "SDA" at 117.729,115.443 h1
  text "SCL" at 117.729,112.903 h1
  text "AGND" at 117.856,110.363 h1
  text "3V3" at 117.729,107.95 h1
  text "PC6" at 67.691,107.823 h1
  text "AGND" at 77.47,107.823 h1
  text "PA1" at 110.871,107.823 h1
  text "PA0" at 101.219,107.696 h1
  text "PC7" at 67.691,105.41 h1
  text "AGND" at 100.33,105.41 h1
  text "KEY_RST" at 111.379,105.283 h1
  text "PC8" at 77.343,105.156 h1
  text "UNION V2.0" at 126.873,104.267 h2.5 r90